# Altium PCB BuySellDisplay2.PcbDoc (part 1 of 2)
Units mil, origin at the board's own origin, x right, y up, seen from the top; angles counter-clockwise.
Board outline 6000 x 4000 mil, 2 copper layers (Top Layer, Bottom Layer); 218 components, 207 nets, 568 pads, 108 vias.
Unrouted connection lines stored in the file: 273.
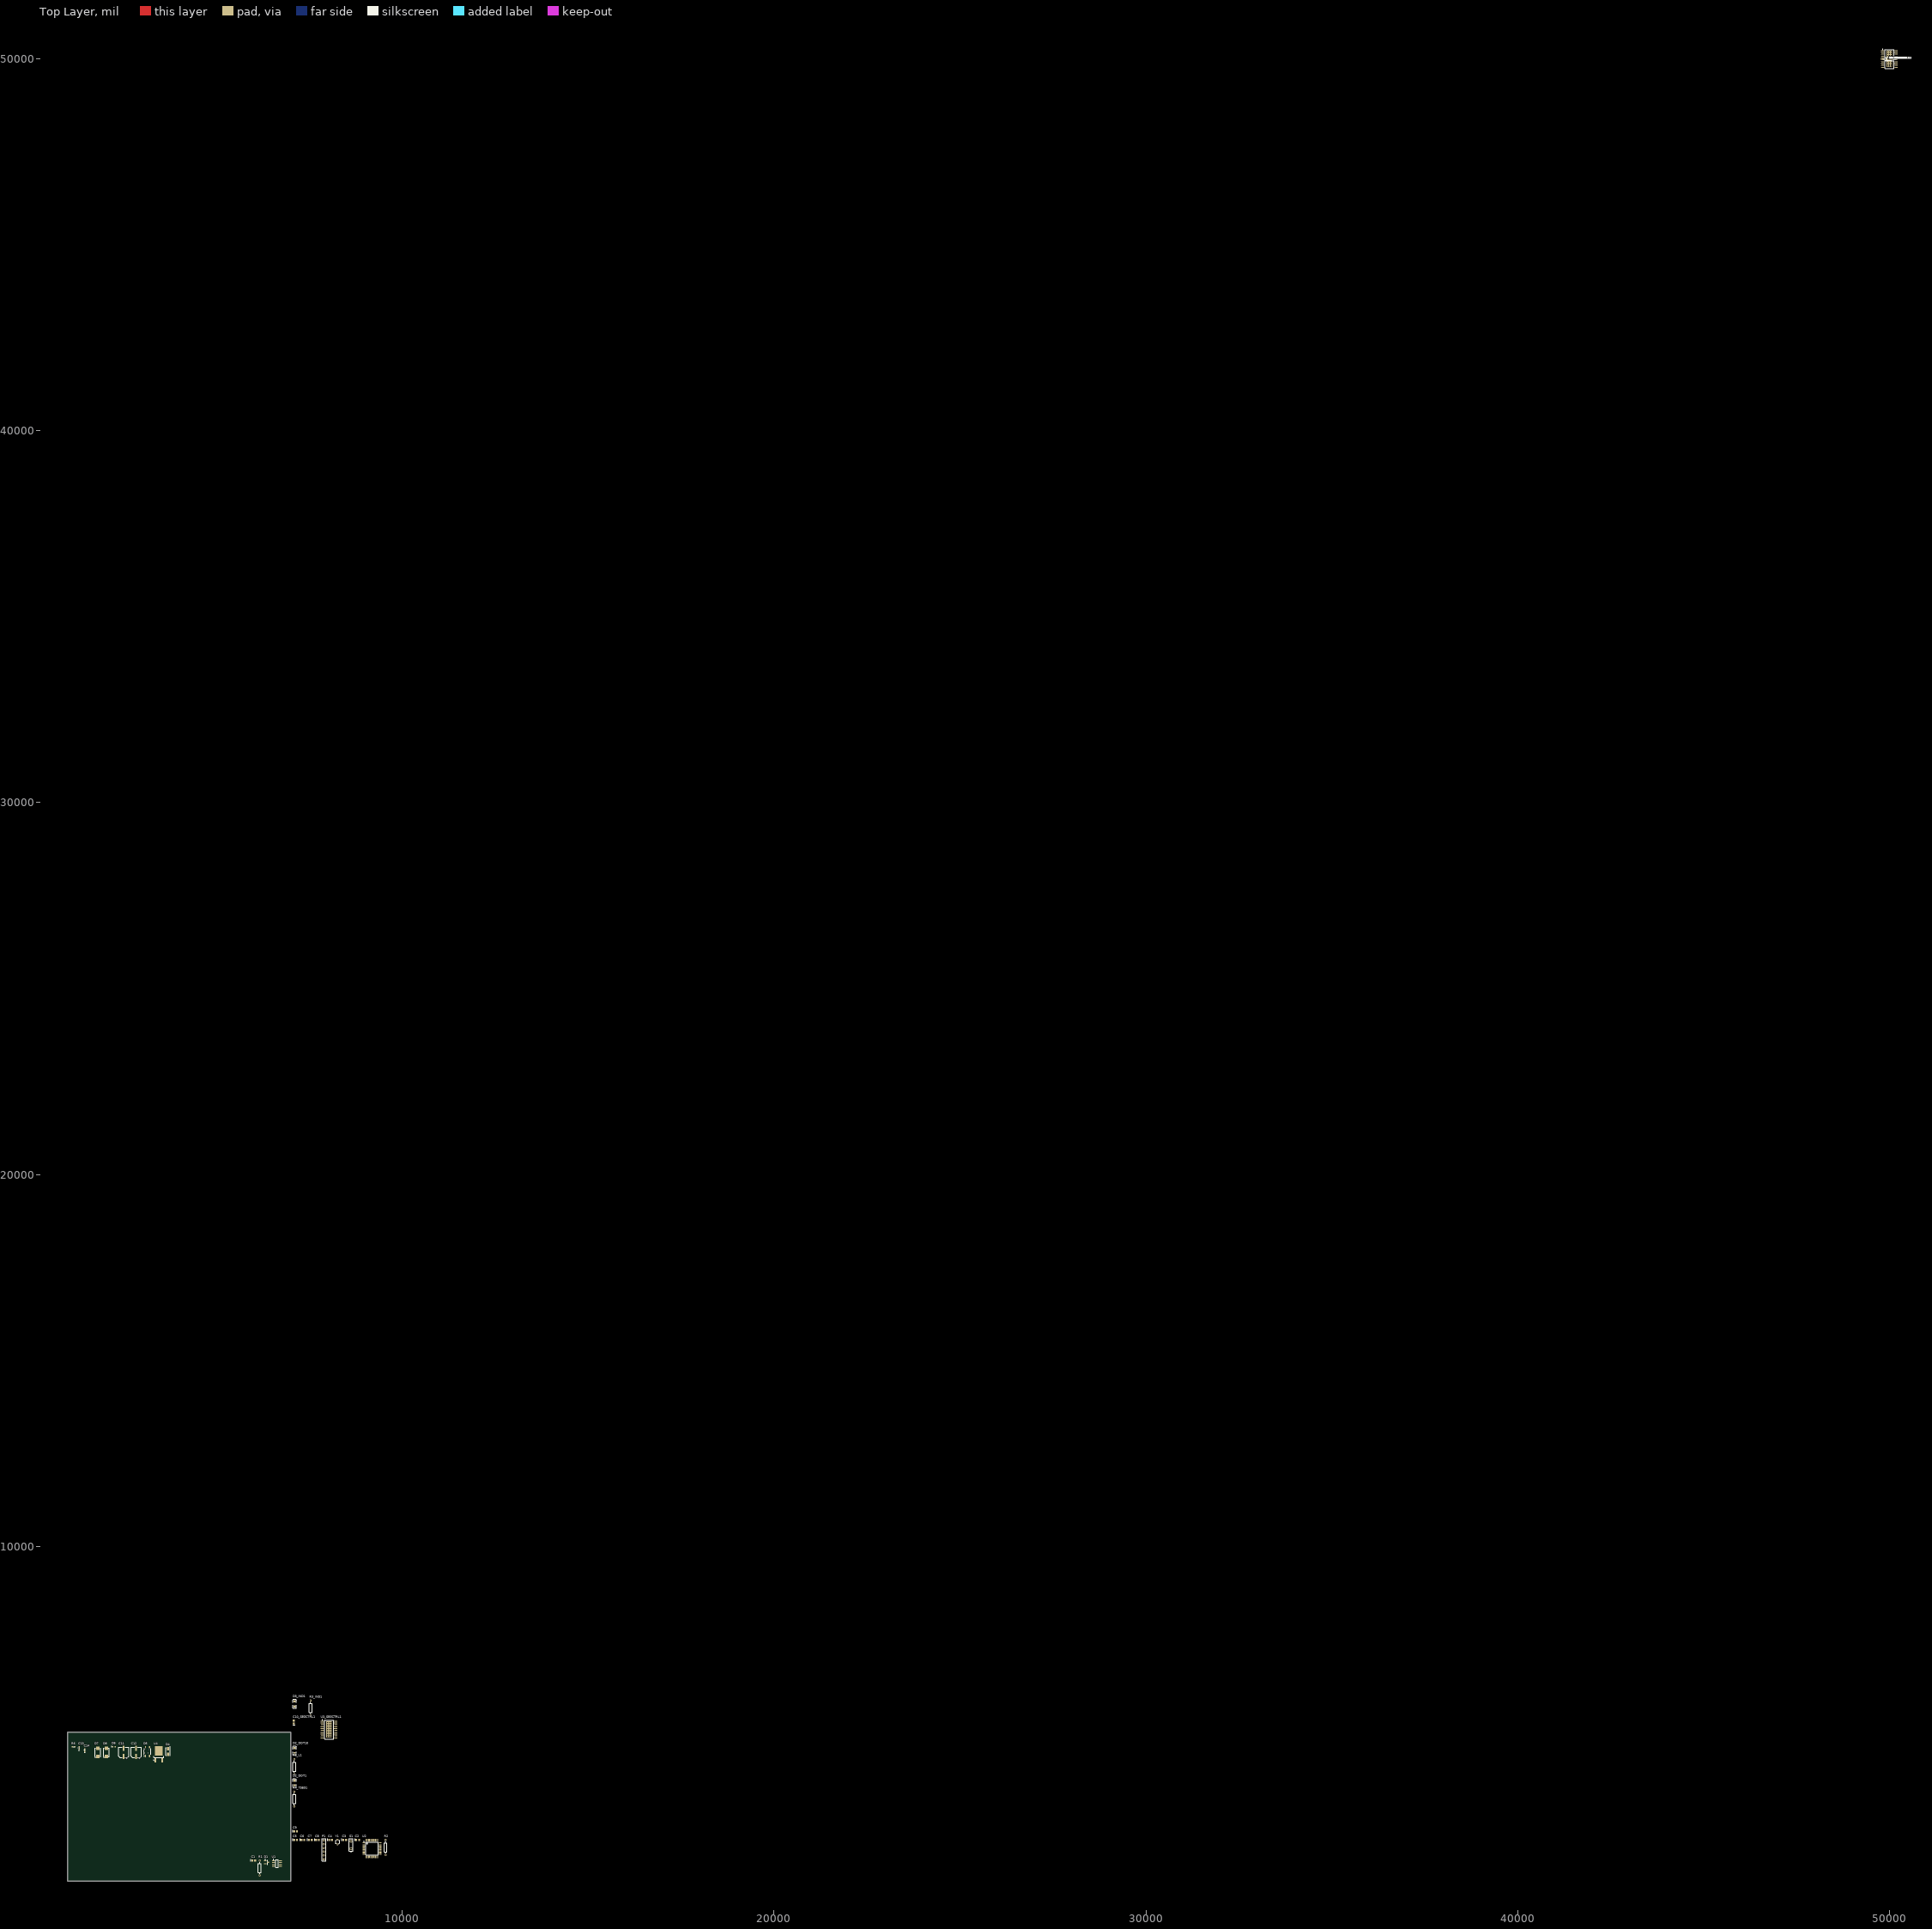
[diagram p0: Top Layer view]
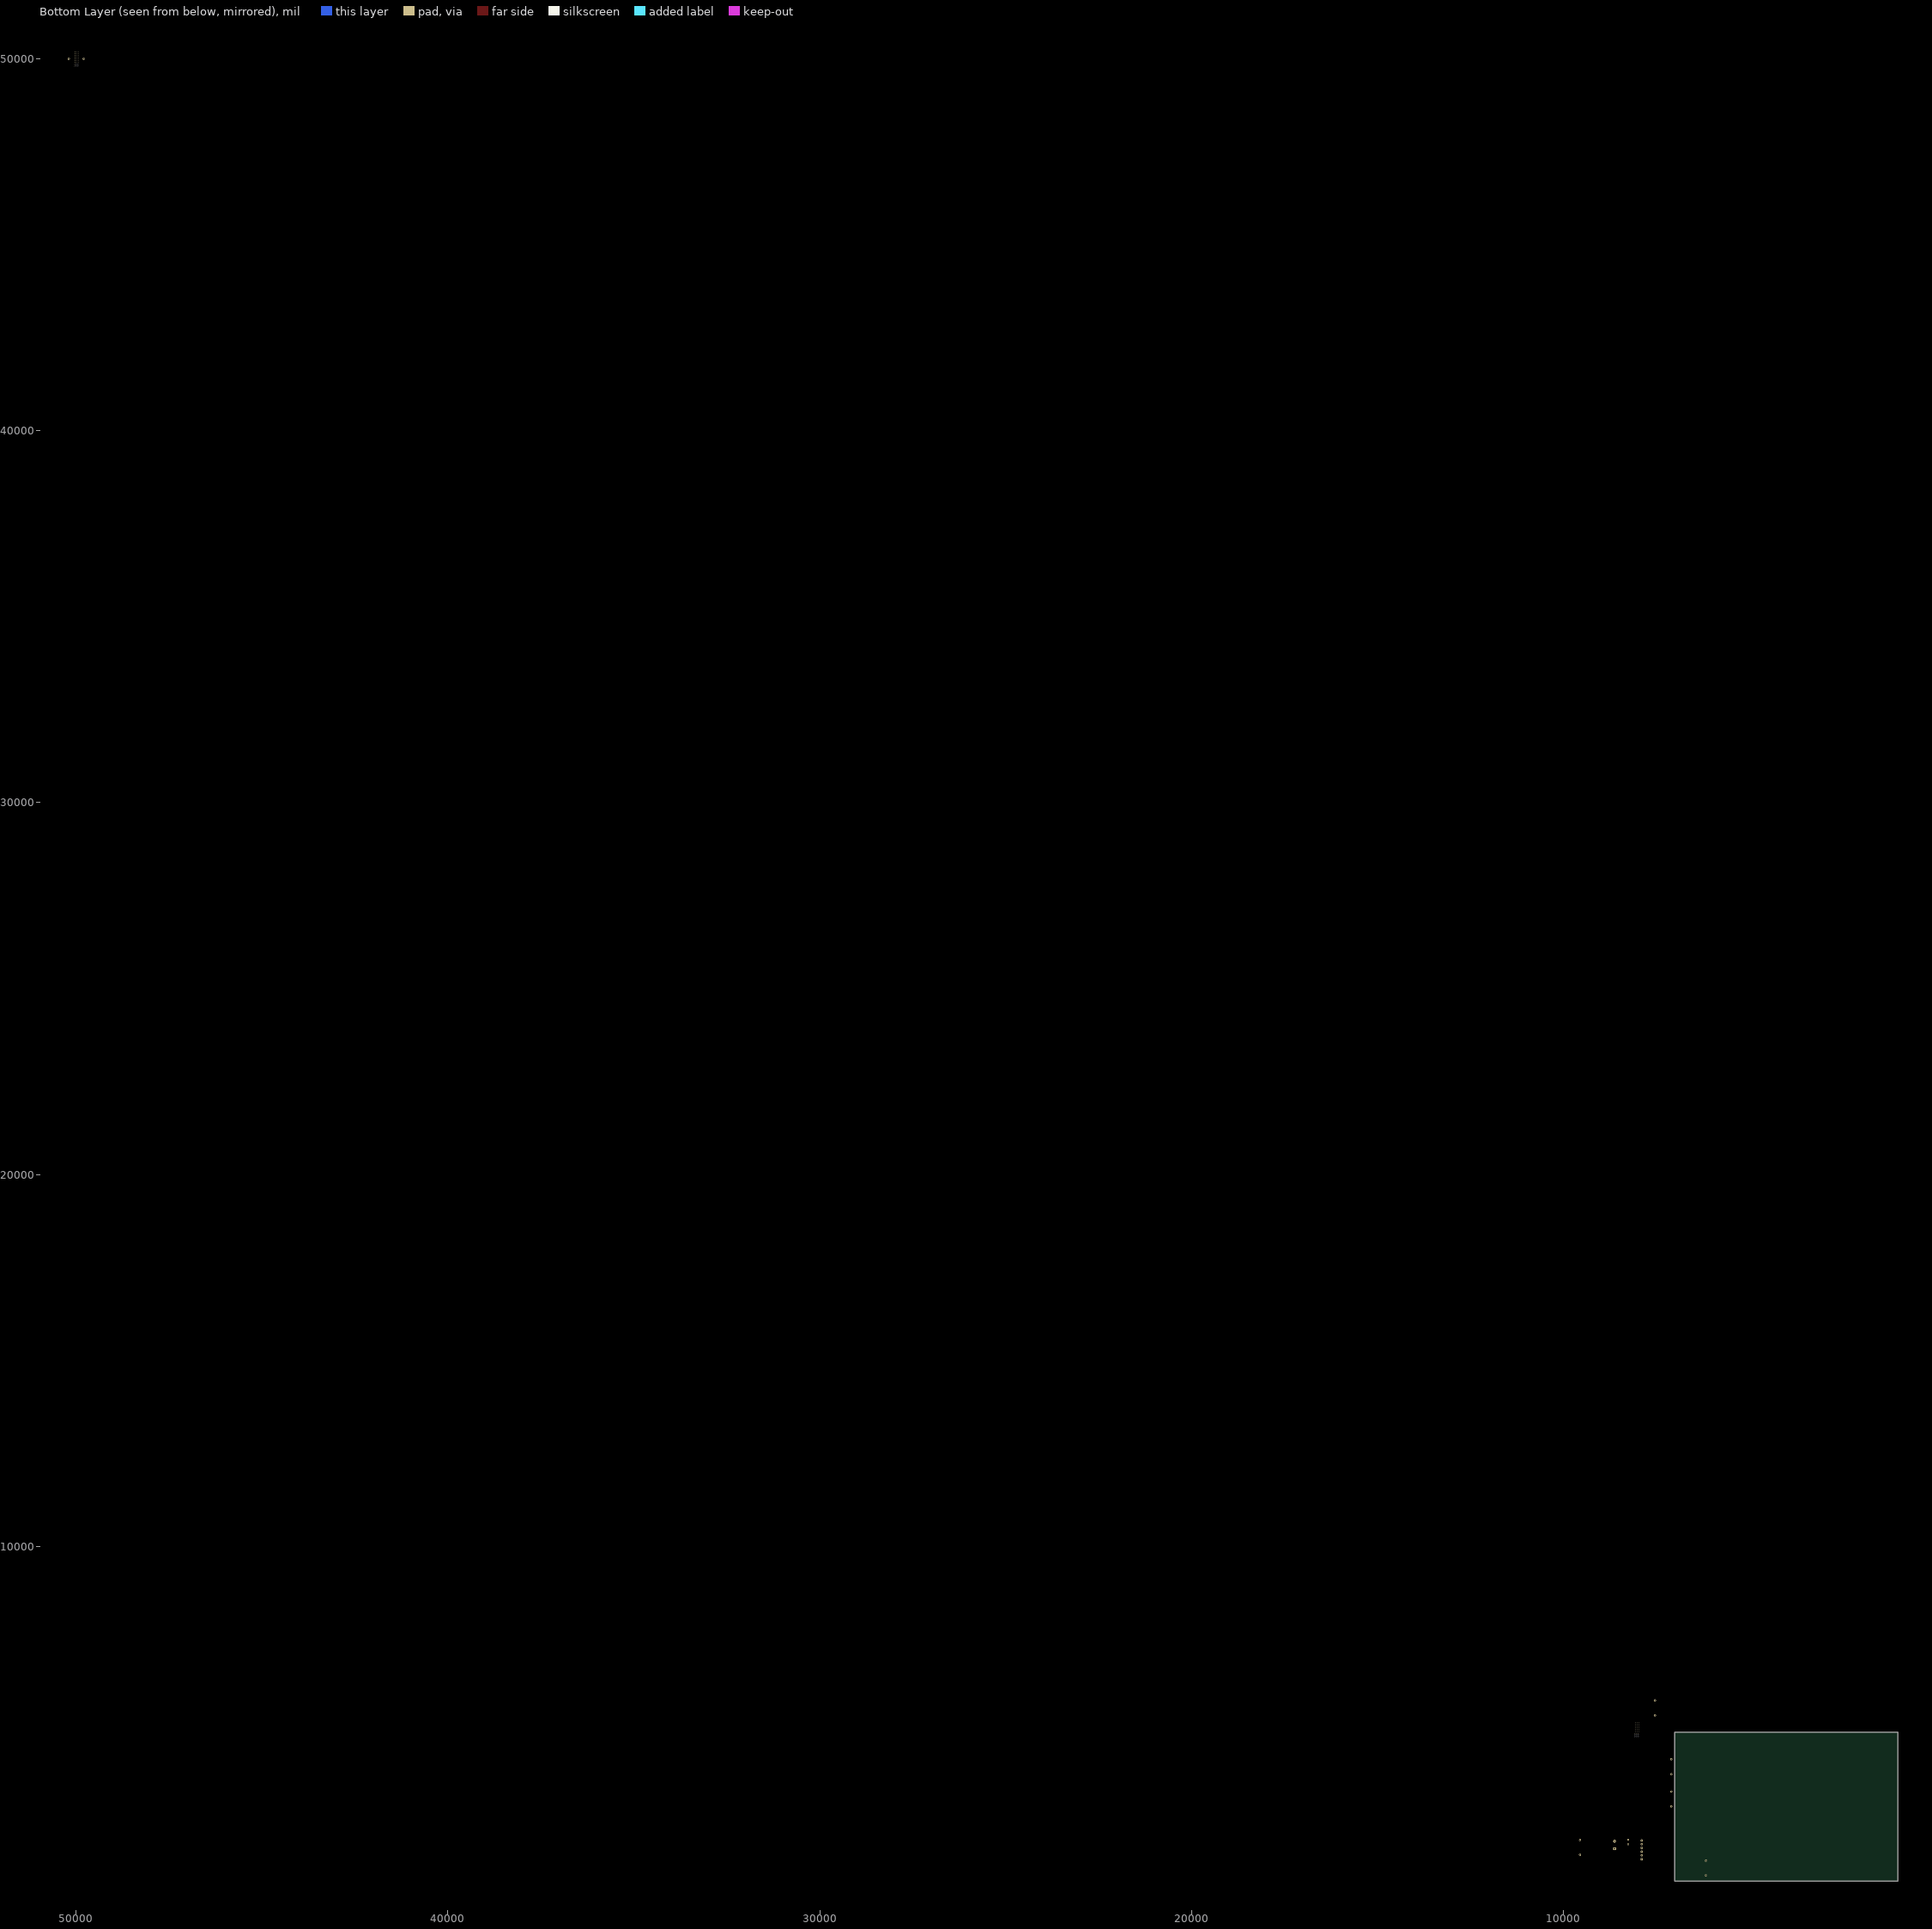
[diagram p1: Bottom Layer view, seen from below]

## Layer stack, top to bottom
Top Layer: signal copper 1.4
Dielectric: dielectric 12.6, FR-4, Dk 4.8
Bottom Layer: signal copper 1.4

## Board outline
1000,1000 7000,1000 7000,5000 1000,5000

## Design rules (kind name [scope] priority, off if disabled: settings)
Clearance [All] p1: gap=10
ComponentClearance [All] p1: gap=10 collisioncheckmode=3 verticalgap=10
PolygonConnect [All] p1: connectstyle=Relief reliefconductorwidth=10 reliefentries=4 polygonreliefangle="90 Angle"
RoomDefinition 7SEG1 [InComponentClass('7SEG1')] p1: confinementstyle=ConfineIn formatcopy=TRUE lockcomponents=FALSE outline 7045,2960 7520,2960 7520,3560 7045,3560
RoomDefinition 7SEG2 [InComponentClass('7SEG2')] p2: confinementstyle=ConfineIn formatcopy=TRUE lockcomponents=FALSE outline 49755,49950 50475,49950 50475,50075 49755,50075
RoomDefinition 7SEG3 [InComponentClass('7SEG3')] p3: confinementstyle=ConfineIn formatcopy=TRUE lockcomponents=FALSE outline 49755,49950 50475,49950 50475,50075 49755,50075
RoomDefinition 7SEG4 [InComponentClass('7SEG4')] p4: confinementstyle=ConfineIn formatcopy=TRUE lockcomponents=FALSE outline 49755,49950 50475,49950 50475,50075 49755,50075
RoomDefinition COM485 [InComponentClass('COM485')] p5: confinementstyle=ConfineIn formatcopy=TRUE lockcomponents=FALSE outline 5920,1105 6785,1105 6785,1695 5920,1695
RoomDefinition CPU [InComponentClass('CPU')] p6: confinementstyle=ConfineIn formatcopy=TRUE lockcomponents=FALSE outline 7045,1530 9635,1530 9635,2250 7045,2250
RoomDefinition DISPLAY [InComponentClass('DISPLAY')] p7: confinementstyle=ConfineIn formatcopy=TRUE lockcomponents=FALSE outline 7045,2300 7205,2300 7205,2480 7045,2480
RoomDefinition DOT1 [InComponentClass('DOT1')] p8: confinementstyle=ConfineIn formatcopy=TRUE lockcomponents=FALSE outline 7045,3510 7460,3510 7460,3880 7045,3880
RoomDefinition DOT2 [InComponentClass('DOT2')] p9: confinementstyle=ConfineIn formatcopy=TRUE lockcomponents=FALSE outline 49875,49945 50415,49945 50415,50075 49875,50075
RoomDefinition DOT3 [InComponentClass('DOT3')] p10: confinementstyle=ConfineIn formatcopy=TRUE lockcomponents=FALSE outline 49875,49945 50415,49945 50415,50075 49875,50075
RoomDefinition DOT4 [InComponentClass('DOT4')] p11: confinementstyle=ConfineIn formatcopy=TRUE lockcomponents=FALSE outline 49875,49945 50415,49945 50415,50075 49875,50075
RoomDefinition DOT5 [InComponentClass('DOT5')] p12: confinementstyle=ConfineIn formatcopy=TRUE lockcomponents=FALSE outline 49875,49945 50415,49945 50415,50075 49875,50075
RoomDefinition DOT6 [InComponentClass('DOT6')] p13: confinementstyle=ConfineIn formatcopy=TRUE lockcomponents=FALSE outline 49875,49945 50415,49945 50415,50075 49875,50075
RoomDefinition DOT7 [InComponentClass('DOT7')] p14: confinementstyle=ConfineIn formatcopy=TRUE lockcomponents=FALSE outline 49875,49945 50415,49945 50415,50075 49875,50075
RoomDefinition DOT8 [InComponentClass('DOT8')] p15: confinementstyle=ConfineIn formatcopy=TRUE lockcomponents=FALSE outline 49875,49945 50415,49945 50415,50075 49875,50075
RoomDefinition DOT9 [InComponentClass('DOT9')] p16: confinementstyle=ConfineIn formatcopy=TRUE lockcomponents=FALSE outline 49875,49945 50415,49945 50415,50075 49875,50075
RoomDefinition DOT10 [InComponentClass('DOT10')] p17: confinementstyle=ConfineIn formatcopy=TRUE lockcomponents=FALSE outline 7045,4380 7530,4380 7530,4750 7045,4750
RoomDefinition DOT11 [InComponentClass('DOT11')] p18: confinementstyle=ConfineIn formatcopy=TRUE lockcomponents=FALSE outline 49875,49945 50445,49945 50445,50075 49875,50075
RoomDefinition DOT12 [InComponentClass('DOT12')] p19: confinementstyle=ConfineIn formatcopy=TRUE lockcomponents=FALSE outline 49875,49945 50465,49945 50465,50075 49875,50075
RoomDefinition DOT13 [InComponentClass('DOT13')] p20: confinementstyle=ConfineIn formatcopy=TRUE lockcomponents=FALSE outline 49875,49945 50465,49945 50465,50075 49875,50075
RoomDefinition DOT14 [InComponentClass('DOT14')] p21: confinementstyle=ConfineIn formatcopy=TRUE lockcomponents=FALSE outline 49875,49945 50465,49945 50465,50075 49875,50075
RoomDefinition DOT15 [InComponentClass('DOT15')] p22: confinementstyle=ConfineIn formatcopy=TRUE lockcomponents=FALSE outline 49875,49945 50465,49945 50465,50075 49875,50075
RoomDefinition DOT16 [InComponentClass('DOT16')] p23: confinementstyle=ConfineIn formatcopy=TRUE lockcomponents=FALSE outline 49875,49945 50465,49945 50465,50075 49875,50075
RoomDefinition DOT17 [InComponentClass('DOT17')] p24: confinementstyle=ConfineIn formatcopy=TRUE lockcomponents=FALSE outline 49875,49945 50465,49945 50465,50075 49875,50075
RoomDefinition DOT18 [InComponentClass('DOT18')] p25: confinementstyle=ConfineIn formatcopy=TRUE lockcomponents=FALSE outline 49875,49945 50465,49945 50465,50075 49875,50075
RoomDefinition DOT19 [InComponentClass('DOT19')] p26: confinementstyle=ConfineIn formatcopy=TRUE lockcomponents=FALSE outline 49875,49945 50465,49945 50465,50075 49875,50075
RoomDefinition DOT20 [InComponentClass('DOT20')] p27: confinementstyle=ConfineIn formatcopy=TRUE lockcomponents=FALSE outline 49875,49945 50475,49945 50475,50075 49875,50075
RoomDefinition DOT21 [InComponentClass('DOT21')] p28: confinementstyle=ConfineIn formatcopy=TRUE lockcomponents=FALSE outline 49875,49945 50455,49945 50455,50075 49875,50075
RoomDefinition DOT22 [InComponentClass('DOT22')] p29: confinementstyle=ConfineIn formatcopy=TRUE lockcomponents=FALSE outline 49875,49945 50475,49945 50475,50075 49875,50075
RoomDefinition DOT23 [InComponentClass('DOT23')] p30: confinementstyle=ConfineIn formatcopy=TRUE lockcomponents=FALSE outline 49875,49945 50475,49945 50475,50075 49875,50075
RoomDefinition DOT24 [InComponentClass('DOT24')] p31: confinementstyle=ConfineIn formatcopy=TRUE lockcomponents=FALSE outline 49875,49945 50475,49945 50475,50075 49875,50075
RoomDefinition DOT25 [InComponentClass('DOT25')] p32: confinementstyle=ConfineIn formatcopy=TRUE lockcomponents=FALSE outline 49875,49945 50475,49945 50475,50075 49875,50075
RoomDefinition DOT26 [InComponentClass('DOT26')] p33: confinementstyle=ConfineIn formatcopy=TRUE lockcomponents=FALSE outline 49875,49945 50475,49945 50475,50075 49875,50075
RoomDefinition DOT27 [InComponentClass('DOT27')] p34: confinementstyle=ConfineIn formatcopy=TRUE lockcomponents=FALSE outline 49875,49945 50475,49945 50475,50075 49875,50075
RoomDefinition DOT28 [InComponentClass('DOT28')] p35: confinementstyle=ConfineIn formatcopy=TRUE lockcomponents=FALSE outline 49875,49945 50475,49945 50475,50075 49875,50075
RoomDefinition DOT29 [InComponentClass('DOT29')] p36: confinementstyle=ConfineIn formatcopy=TRUE lockcomponents=FALSE outline 49875,49945 50475,49945 50475,50075 49875,50075
RoomDefinition DOT30 [InComponentClass('DOT30')] p37: confinementstyle=ConfineIn formatcopy=TRUE lockcomponents=FALSE outline 49875,49945 50475,49945 50475,50075 49875,50075
RoomDefinition DOT31 [InComponentClass('DOT31')] p38: confinementstyle=ConfineIn formatcopy=TRUE lockcomponents=FALSE outline 49875,49945 50455,49945 50455,50075 49875,50075
RoomDefinition DOT32 [InComponentClass('DOT32')] p39: confinementstyle=ConfineIn formatcopy=TRUE lockcomponents=FALSE outline 49875,49945 50475,49945 50475,50075 49875,50075
RoomDefinition DOT33 [InComponentClass('DOT33')] p40: confinementstyle=ConfineIn formatcopy=TRUE lockcomponents=FALSE outline 49875,49945 50475,49945 50475,50075 49875,50075
RoomDefinition DOT34 [InComponentClass('DOT34')] p41: confinementstyle=ConfineIn formatcopy=TRUE lockcomponents=FALSE outline 49875,49945 50475,49945 50475,50075 49875,50075
RoomDefinition DOT35 [InComponentClass('DOT35')] p42: confinementstyle=ConfineIn formatcopy=TRUE lockcomponents=FALSE outline 49875,49945 50475,49945 50475,50075 49875,50075
RoomDefinition DOT36 [InComponentClass('DOT36')] p43: confinementstyle=ConfineIn formatcopy=TRUE lockcomponents=FALSE outline 49875,49945 50475,49945 50475,50075 49875,50075
RoomDefinition DOT37 [InComponentClass('DOT37')] p44: confinementstyle=ConfineIn formatcopy=TRUE lockcomponents=FALSE outline 49875,49945 50475,49945 50475,50075 49875,50075
RoomDefinition DOT38 [InComponentClass('DOT38')] p45: confinementstyle=ConfineIn formatcopy=TRUE lockcomponents=FALSE outline 49875,49945 50475,49945 50475,50075 49875,50075
RoomDefinition DOT39 [InComponentClass('DOT39')] p46: confinementstyle=ConfineIn formatcopy=TRUE lockcomponents=FALSE outline 49875,49945 50475,49945 50475,50075 49875,50075
RoomDefinition DOT40 [InComponentClass('DOT40')] p47: confinementstyle=ConfineIn formatcopy=TRUE lockcomponents=FALSE outline 49875,49945 50475,49945 50475,50075 49875,50075
RoomDefinition DOT41 [InComponentClass('DOT41')] p48: confinementstyle=ConfineIn formatcopy=TRUE lockcomponents=FALSE outline 49875,49945 50455,49945 50455,50075 49875,50075
RoomDefinition DOT42 [InComponentClass('DOT42')] p49: confinementstyle=ConfineIn formatcopy=TRUE lockcomponents=FALSE outline 49875,49945 50475,49945 50475,50075 49875,50075
RoomDefinition DOT43 [InComponentClass('DOT43')] p50: confinementstyle=ConfineIn formatcopy=TRUE lockcomponents=FALSE outline 49875,49945 50475,49945 50475,50075 49875,50075
RoomDefinition DOT44 [InComponentClass('DOT44')] p51: confinementstyle=ConfineIn formatcopy=TRUE lockcomponents=FALSE outline 49875,49945 50475,49945 50475,50075 49875,50075
RoomDefinition DOT45 [InComponentClass('DOT45')] p52: confinementstyle=ConfineIn formatcopy=TRUE lockcomponents=FALSE outline 49875,49945 50475,49945 50475,50075 49875,50075
RoomDefinition DOT46 [InComponentClass('DOT46')] p53: confinementstyle=ConfineIn formatcopy=TRUE lockcomponents=FALSE outline 49875,49945 50475,49945 50475,50075 49875,50075
RoomDefinition DOT47 [InComponentClass('DOT47')] p54: confinementstyle=ConfineIn formatcopy=TRUE lockcomponents=FALSE outline 49875,49945 50475,49945 50475,50075 49875,50075
RoomDefinition DOT48 [InComponentClass('DOT48')] p55: confinementstyle=ConfineIn formatcopy=TRUE lockcomponents=FALSE outline 49875,49945 50475,49945 50475,50075 49875,50075
RoomDefinition DOT49 [InComponentClass('DOT49')] p56: confinementstyle=ConfineIn formatcopy=TRUE lockcomponents=FALSE outline 49875,49945 50475,49945 50475,50075 49875,50075
RoomDefinition DOT50 [InComponentClass('DOT50')] p57: confinementstyle=ConfineIn formatcopy=TRUE lockcomponents=FALSE outline 49875,49945 50475,49945 50475,50075 49875,50075
RoomDefinition DOT51 [InComponentClass('DOT51')] p58: confinementstyle=ConfineIn formatcopy=TRUE lockcomponents=FALSE outline 49875,49945 50455,49945 50455,50075 49875,50075
RoomDefinition DOT52 [InComponentClass('DOT52')] p59: confinementstyle=ConfineIn formatcopy=TRUE lockcomponents=FALSE outline 49875,49945 50475,49945 50475,50075 49875,50075
RoomDefinition DOT53 [InComponentClass('DOT53')] p60: confinementstyle=ConfineIn formatcopy=TRUE lockcomponents=FALSE outline 49875,49945 50475,49945 50475,50075 49875,50075
RoomDefinition DOT54 [InComponentClass('DOT54')] p61: confinementstyle=ConfineIn formatcopy=TRUE lockcomponents=FALSE outline 49875,49945 50475,49945 50475,50075 49875,50075
RoomDefinition DOT55 [InComponentClass('DOT55')] p62: confinementstyle=ConfineIn formatcopy=TRUE lockcomponents=FALSE outline 49875,49945 50475,49945 50475,50075 49875,50075
RoomDefinition DOT56 [InComponentClass('DOT56')] p63: confinementstyle=ConfineIn formatcopy=TRUE lockcomponents=FALSE outline 49875,49945 50475,49945 50475,50075 49875,50075
RoomDefinition DOT57 [InComponentClass('DOT57')] p64: confinementstyle=ConfineIn formatcopy=TRUE lockcomponents=FALSE outline 49875,49945 50475,49945 50475,50075 49875,50075
RoomDefinition DOT58 [InComponentClass('DOT58')] p65: confinementstyle=ConfineIn formatcopy=TRUE lockcomponents=FALSE outline 49875,49945 50475,49945 50475,50075 49875,50075
RoomDefinition DOT59 [InComponentClass('DOT59')] p66: confinementstyle=ConfineIn formatcopy=TRUE lockcomponents=FALSE outline 49875,49945 50475,49945 50475,50075 49875,50075
RoomDefinition DOT60 [InComponentClass('DOT60')] p67: confinementstyle=ConfineIn formatcopy=TRUE lockcomponents=FALSE outline 49875,49945 50475,49945 50475,50075 49875,50075
RoomDefinition DOT61 [InComponentClass('DOT61')] p68: confinementstyle=ConfineIn formatcopy=TRUE lockcomponents=FALSE outline 49875,49945 50455,49945 50455,50075 49875,50075
RoomDefinition DOT62 [InComponentClass('DOT62')] p69: confinementstyle=ConfineIn formatcopy=TRUE lockcomponents=FALSE outline 49875,49945 50475,49945 50475,50075 49875,50075
RoomDefinition DOT63 [InComponentClass('DOT63')] p70: confinementstyle=ConfineIn formatcopy=TRUE lockcomponents=FALSE outline 49875,49945 50475,49945 50475,50075 49875,50075
RoomDefinition DOT64 [InComponentClass('DOT64')] p71: confinementstyle=ConfineIn formatcopy=TRUE lockcomponents=FALSE outline 49875,49945 50475,49945 50475,50075 49875,50075
RoomDefinition DOT65 [InComponentClass('DOT65')] p72: confinementstyle=ConfineIn formatcopy=TRUE lockcomponents=FALSE outline 49875,49945 50475,49945 50475,50075 49875,50075
RoomDefinition DOT66 [InComponentClass('DOT66')] p73: confinementstyle=ConfineIn formatcopy=TRUE lockcomponents=FALSE outline 49875,49945 50475,49945 50475,50075 49875,50075
RoomDefinition DOT67 [InComponentClass('DOT67')] p74: confinementstyle=ConfineIn formatcopy=TRUE lockcomponents=FALSE outline 49875,49945 50475,49945 50475,50075 49875,50075
RoomDefinition DOT68 [InComponentClass('DOT68')] p75: confinementstyle=ConfineIn formatcopy=TRUE lockcomponents=FALSE outline 49875,49945 50475,49945 50475,50075 49875,50075
RoomDefinition DOT69 [InComponentClass('DOT69')] p76: confinementstyle=ConfineIn formatcopy=TRUE lockcomponents=FALSE outline 49875,49945 50475,49945 50475,50075 49875,50075
RoomDefinition DOT70 [InComponentClass('DOT70')] p77: confinementstyle=ConfineIn formatcopy=TRUE lockcomponents=FALSE outline 49875,49945 50475,49945 50475,50075 49875,50075
RoomDefinition DOT71 [InComponentClass('DOT71')] p78: confinementstyle=ConfineIn formatcopy=TRUE lockcomponents=FALSE outline 49875,49945 50455,49945 50455,50075 49875,50075
RoomDefinition DOT72 [InComponentClass('DOT72')] p79: confinementstyle=ConfineIn formatcopy=TRUE lockcomponents=FALSE outline 49875,49945 50475,49945 50475,50075 49875,50075
RoomDefinition DOT73 [InComponentClass('DOT73')] p80: confinementstyle=ConfineIn formatcopy=TRUE lockcomponents=FALSE outline 49875,49945 50475,49945 50475,50075 49875,50075
RoomDefinition DOT74 [InComponentClass('DOT74')] p81: confinementstyle=ConfineIn formatcopy=TRUE lockcomponents=FALSE outline 49875,49945 50475,49945 50475,50075 49875,50075
RoomDefinition DOT75 [InComponentClass('DOT75')] p82: confinementstyle=ConfineIn formatcopy=TRUE lockcomponents=FALSE outline 49875,49945 50475,49945 50475,50075 49875,50075
RoomDefinition DOT76 [InComponentClass('DOT76')] p83: confinementstyle=ConfineIn formatcopy=TRUE lockcomponents=FALSE outline 49875,49945 50475,49945 50475,50075 49875,50075
RoomDefinition DOT77 [InComponentClass('DOT77')] p84: confinementstyle=ConfineIn formatcopy=TRUE lockcomponents=FALSE outline 49875,49945 50475,49945 50475,50075 49875,50075
RoomDefinition DOT78 [InComponentClass('DOT78')] p85: confinementstyle=ConfineIn formatcopy=TRUE lockcomponents=FALSE outline 49875,49945 50475,49945 50475,50075 49875,50075
RoomDefinition DOT79 [InComponentClass('DOT79')] p86: confinementstyle=ConfineIn formatcopy=TRUE lockcomponents=FALSE outline 49875,49945 50475,49945 50475,50075 49875,50075
RoomDefinition DOT80 [InComponentClass('DOT80')] p87: confinementstyle=ConfineIn formatcopy=TRUE lockcomponents=FALSE outline 49875,49945 50475,49945 50475,50075 49875,50075
RoomDefinition DOT81 [InComponentClass('DOT81')] p88: confinementstyle=ConfineIn formatcopy=TRUE lockcomponents=FALSE outline 49875,49945 50455,49945 50455,50075 49875,50075
RoomDefinition DOT82 [InComponentClass('DOT82')] p89: confinementstyle=ConfineIn formatcopy=TRUE lockcomponents=FALSE outline 49875,49945 50475,49945 50475,50075 49875,50075
RoomDefinition DOT83 [InComponentClass('DOT83')] p90: confinementstyle=ConfineIn formatcopy=TRUE lockcomponents=FALSE outline 49875,49945 50475,49945 50475,50075 49875,50075
RoomDefinition DOT84 [InComponentClass('DOT84')] p91: confinementstyle=ConfineIn formatcopy=TRUE lockcomponents=FALSE outline 49875,49945 50475,49945 50475,50075 49875,50075
RoomDefinition DOT85 [InComponentClass('DOT85')] p92: confinementstyle=ConfineIn formatcopy=TRUE lockcomponents=FALSE outline 49875,49945 50475,49945 50475,50075 49875,50075
RoomDefinition DOT86 [InComponentClass('DOT86')] p93: confinementstyle=ConfineIn formatcopy=TRUE lockcomponents=FALSE outline 49875,49945 50475,49945 50475,50075 49875,50075
RoomDefinition DOT87 [InComponentClass('DOT87')] p94: confinementstyle=ConfineIn formatcopy=TRUE lockcomponents=FALSE outline 49875,49945 50475,49945 50475,50075 49875,50075
RoomDefinition DOT88 [InComponentClass('DOT88')] p95: confinementstyle=ConfineIn formatcopy=TRUE lockcomponents=FALSE outline 49875,49945 50475,49945 50475,50075 49875,50075
RoomDefinition DOT89 [InComponentClass('DOT89')] p96: confinementstyle=ConfineIn formatcopy=TRUE lockcomponents=FALSE outline 49875,49945 50475,49945 50475,50075 49875,50075
RoomDefinition DOT90 [InComponentClass('DOT90')] p97: confinementstyle=ConfineIn formatcopy=TRUE lockcomponents=FALSE outline 49875,49945 50475,49945 50475,50075 49875,50075
RoomDefinition DOT91 [InComponentClass('DOT91')] p98: confinementstyle=ConfineIn formatcopy=TRUE lockcomponents=FALSE outline 49875,49945 50455,49945 50455,50075 49875,50075
RoomDefinition DOT92 [InComponentClass('DOT92')] p99: confinementstyle=ConfineIn formatcopy=TRUE lockcomponents=FALSE outline 49875,49945 50475,49945 50475,50075 49875,50075
RoomDefinition DOT93 [InComponentClass('DOT93')] p100: confinementstyle=ConfineIn formatcopy=TRUE lockcomponents=FALSE outline 49875,49945 50475,49945 50475,50075 49875,50075
RoomDefinition DOT94 [InComponentClass('DOT94')] p101: confinementstyle=ConfineIn formatcopy=TRUE lockcomponents=FALSE outline 49875,49945 50475,49945 50475,50075 49875,50075
RoomDefinition DOT95 [InComponentClass('DOT95')] p102: confinementstyle=ConfineIn formatcopy=TRUE lockcomponents=FALSE outline 49875,49945 50475,49945 50475,50075 49875,50075
RoomDefinition DOT96 [InComponentClass('DOT96')] p103: confinementstyle=ConfineIn formatcopy=TRUE lockcomponents=FALSE outline 49875,49945 50475,49945 50475,50075 49875,50075
RoomDefinition DOT97 [InComponentClass('DOT97')] p104: confinementstyle=ConfineIn formatcopy=TRUE lockcomponents=FALSE outline 49875,49945 50475,49945 50475,50075 49875,50075
RoomDefinition DOT98 [InComponentClass('DOT98')] p105: confinementstyle=ConfineIn formatcopy=TRUE lockcomponents=FALSE outline 49875,49945 50475,49945 50475,50075 49875,50075
RoomDefinition DOT99 [InComponentClass('DOT99')] p106: confinementstyle=ConfineIn formatcopy=TRUE lockcomponents=FALSE outline 49875,49945 50475,49945 50475,50075 49875,50075
RoomDefinition DOT100 [InComponentClass('DOT100')] p107: confinementstyle=ConfineIn formatcopy=TRUE lockcomponents=FALSE outline 49875,49945 50525,49945 50525,50075 49875,50075
RoomDefinition DOT101 [InComponentClass('DOT101')] p108: confinementstyle=ConfineIn formatcopy=TRUE lockcomponents=FALSE outline 49875,49945 50505,49945 50505,50075 49875,50075
RoomDefinition DOT102 [InComponentClass('DOT102')] p109: confinementstyle=ConfineIn formatcopy=TRUE lockcomponents=FALSE outline 49875,49945 50525,49945 50525,50075 49875,50075
RoomDefinition DOT103 [InComponentClass('DOT103')] p110: confinementstyle=ConfineIn formatcopy=TRUE lockcomponents=FALSE outline 49875,49945 50525,49945 50525,50075 49875,50075
RoomDefinition DOT104 [InComponentClass('DOT104')] p111: confinementstyle=ConfineIn formatcopy=TRUE lockcomponents=FALSE outline 49875,49945 50525,49945 50525,50075 49875,50075
RoomDefinition DOT105 [InComponentClass('DOT105')] p112: confinementstyle=ConfineIn formatcopy=TRUE lockcomponents=FALSE outline 49875,49945 50525,49945 50525,50075 49875,50075
RoomDefinition DOT106 [InComponentClass('DOT106')] p113: confinementstyle=ConfineIn formatcopy=TRUE lockcomponents=FALSE outline 49875,49945 50525,49945 50525,50075 49875,50075
RoomDefinition DOT107 [InComponentClass('DOT107')] p114: confinementstyle=ConfineIn formatcopy=TRUE lockcomponents=FALSE outline 49875,49945 50525,49945 50525,50075 49875,50075
RoomDefinition DOT108 [InComponentClass('DOT108')] p115: confinementstyle=ConfineIn formatcopy=TRUE lockcomponents=FALSE outline 49875,49945 50525,49945 50525,50075 49875,50075
RoomDefinition DOT109 [InComponentClass('DOT109')] p116: confinementstyle=ConfineIn formatcopy=TRUE lockcomponents=FALSE outline 49875,49945 50525,49945 50525,50075 49875,50075
RoomDefinition DOT110 [InComponentClass('DOT110')] p117: confinementstyle=ConfineIn formatcopy=TRUE lockcomponents=FALSE outline 49875,49945 50515,49945 50515,50075 49875,50075
RoomDefinition DOT111 [InComponentClass('DOT111')] p118: confinementstyle=ConfineIn formatcopy=TRUE lockcomponents=FALSE outline 49875,49945 50495,49945 50495,50075 49875,50075
RoomDefinition DOT112 [InComponentClass('DOT112')] p119: confinementstyle=ConfineIn formatcopy=TRUE lockcomponents=FALSE outline 49875,49945 50515,49945 50515,50075 49875,50075
RoomDefinition DOT113 [InComponentClass('DOT113')] p120: confinementstyle=ConfineIn formatcopy=TRUE lockcomponents=FALSE outline 49875,49945 50515,49945 50515,50075 49875,50075
RoomDefinition DOT114 [InComponentClass('DOT114')] p121: confinementstyle=ConfineIn formatcopy=TRUE lockcomponents=FALSE outline 49875,49945 50515,49945 50515,50075 49875,50075
RoomDefinition DOT115 [InComponentClass('DOT115')] p122: confinementstyle=ConfineIn formatcopy=TRUE lockcomponents=FALSE outline 49875,49945 50515,49945 50515,50075 49875,50075
RoomDefinition DOT116 [InComponentClass('DOT116')] p123: confinementstyle=ConfineIn formatcopy=TRUE lockcomponents=FALSE outline 49875,49945 50515,49945 50515,50075 49875,50075
RoomDefinition DOT117 [InComponentClass('DOT117')] p124: confinementstyle=ConfineIn formatcopy=TRUE lockcomponents=FALSE outline 49875,49945 50515,49945 50515,50075 49875,50075
RoomDefinition DOT118 [InComponentClass('DOT118')] p125: confinementstyle=ConfineIn formatcopy=TRUE lockcomponents=FALSE outline 49875,49945 50515,49945 50515,50075 49875,50075
RoomDefinition DOT119 [InComponentClass('DOT119')] p126: confinementstyle=ConfineIn formatcopy=TRUE lockcomponents=FALSE outline 49875,49945 50515,49945 50515,50075 49875,50075
RoomDefinition DOT120 [InComponentClass('DOT120')] p127: confinementstyle=ConfineIn formatcopy=TRUE lockcomponents=FALSE outline 49875,49945 50525,49945 50525,50075 49875,50075
RoomDefinition DOT121 [InComponentClass('DOT121')] p128: confinementstyle=ConfineIn formatcopy=TRUE lockcomponents=FALSE outline 49875,49945 50505,49945 50505,50075 49875,50075
RoomDefinition DOT122 [InComponentClass('DOT122')] p129: confinementstyle=ConfineIn formatcopy=TRUE lockcomponents=FALSE outline 49875,49945 50525,49945 50525,50075 49875,50075
RoomDefinition DOT123 [InComponentClass('DOT123')] p130: confinementstyle=ConfineIn formatcopy=TRUE lockcomponents=FALSE outline 49875,49945 50525,49945 50525,50075 49875,50075
RoomDefinition DOT124 [InComponentClass('DOT124')] p131: confinementstyle=ConfineIn formatcopy=TRUE lockcomponents=FALSE outline 49875,49945 50525,49945 50525,50075 49875,50075
RoomDefinition DOT125 [InComponentClass('DOT125')] p132: confinementstyle=ConfineIn formatcopy=TRUE lockcomponents=FALSE outline 49875,49945 50525,49945 50525,50075 49875,50075
RoomDefinition DOT126 [InComponentClass('DOT126')] p133: confinementstyle=ConfineIn formatcopy=TRUE lockcomponents=FALSE outline 49875,49945 50525,49945 50525,50075 49875,50075
RoomDefinition DOT127 [InComponentClass('DOT127')] p134: confinementstyle=ConfineIn formatcopy=TRUE lockcomponents=FALSE outline 49875,49945 50525,49945 50525,50075 49875,50075
RoomDefinition DOT128 [InComponentClass('DOT128')] p135: confinementstyle=ConfineIn formatcopy=TRUE lockcomponents=FALSE outline 49875,49945 50525,49945 50525,50075 49875,50075
RoomDefinition DOT129 [InComponentClass('DOT129')] p136: confinementstyle=ConfineIn formatcopy=TRUE lockcomponents=FALSE outline 49875,49945 50525,49945 50525,50075 49875,50075
RoomDefinition DOT130 [InComponentClass('DOT130')] p137: confinementstyle=ConfineIn formatcopy=TRUE lockcomponents=FALSE outline 49875,49945 50525,49945 50525,50075 49875,50075
RoomDefinition DOT131 [InComponentClass('DOT131')] p138: confinementstyle=ConfineIn formatcopy=TRUE lockcomponents=FALSE outline 49875,49945 50505,49945 50505,50075 49875,50075
RoomDefinition DOT132 [InComponentClass('DOT132')] p139: confinementstyle=ConfineIn formatcopy=TRUE lockcomponents=FALSE outline 49875,49945 50525,49945 50525,50075 49875,50075
RoomDefinition DOT133 [InComponentClass('DOT133')] p140: confinementstyle=ConfineIn formatcopy=TRUE lockcomponents=FALSE outline 49875,49945 50525,49945 50525,50075 49875,50075
RoomDefinition DOT134 [InComponentClass('DOT134')] p141: confinementstyle=ConfineIn formatcopy=TRUE lockcomponents=FALSE outline 49875,49945 50525,49945 50525,50075 49875,50075
RoomDefinition DOT135 [InComponentClass('DOT135')] p142: confinementstyle=ConfineIn formatcopy=TRUE lockcomponents=FALSE outline 49875,49945 50525,49945 50525,50075 49875,50075
RoomDefinition DOT136 [InComponentClass('DOT136')] p143: confinementstyle=ConfineIn formatcopy=TRUE lockcomponents=FALSE outline 49875,49945 50525,49945 50525,50075 49875,50075
RoomDefinition DOT137 [InComponentClass('DOT137')] p144: confinementstyle=ConfineIn formatcopy=TRUE lockcomponents=FALSE outline 49875,49945 50525,49945 50525,50075 49875,50075
RoomDefinition DOT138 [InComponentClass('DOT138')] p145: confinementstyle=ConfineIn formatcopy=TRUE lockcomponents=FALSE outline 49875,49945 50525,49945 50525,50075 49875,50075
RoomDefinition DOT139 [InComponentClass('DOT139')] p146: confinementstyle=ConfineIn formatcopy=TRUE lockcomponents=FALSE outline 49875,49945 50525,49945 50525,50075 49875,50075
RoomDefinition DOT140 [InComponentClass('DOT140')] p147: confinementstyle=ConfineIn formatcopy=TRUE lockcomponents=FALSE outline 49875,49945 50525,49945 50525,50075 49875,50075
RoomDefinition DOT141 [InComponentClass('DOT141')] p148: confinementstyle=ConfineIn formatcopy=TRUE lockcomponents=FALSE outline 49875,49945 50505,49945 50505,50075 49875,50075
RoomDefinition DOT142 [InComponentClass('DOT142')] p149: confinementstyle=ConfineIn formatcopy=TRUE lockcomponents=FALSE outline 49875,49945 50525,49945 50525,50075 49875,50075
RoomDefinition DOT143 [InComponentClass('DOT143')] p150: confinementstyle=ConfineIn formatcopy=TRUE lockcomponents=FALSE outline 49875,49945 50525,49945 50525,50075 49875,50075
RoomDefinition DOT144 [InComponentClass('DOT144')] p151: confinementstyle=ConfineIn formatcopy=TRUE lockcomponents=FALSE outline 49875,49945 50525,49945 50525,50075 49875,50075
RoomDefinition IND1 [InComponentClass('IND1')] p152: confinementstyle=ConfineIn formatcopy=TRUE lockcomponents=FALSE outline 7045,5410 7890,5410 7890,6010 7045,6010
RoomDefinition IND2 [InComponentClass('IND2')] p153: confinementstyle=ConfineIn formatcopy=TRUE lockcomponents=FALSE outline 49755,49945 50405,49945 50405,50075 49755,50075
RoomDefinition IND3 [InComponentClass('IND3')] p154: confinementstyle=ConfineIn formatcopy=TRUE lockcomponents=FALSE outline 49755,49945 50405,49945 50405,50075 49755,50075
RoomDefinition L1 [InComponentClass('L1')] p155: confinementstyle=ConfineIn formatcopy=TRUE lockcomponents=FALSE outline 7045,3830 7340,3830 7340,4430 7045,4430
RoomDefinition L2 [InComponentClass('L2')] p156: confinementstyle=ConfineIn formatcopy=TRUE lockcomponents=FALSE outline 49755,49950 50295,49950 50295,50075 49755,50075
RoomDefinition L3 [InComponentClass('L3')] p157: confinementstyle=ConfineIn formatcopy=TRUE lockcomponents=FALSE outline 49755,49950 50295,49950 50295,50075 49755,50075
RoomDefinition L4 [InComponentClass('L4')] p158: confinementstyle=ConfineIn formatcopy=TRUE lockcomponents=FALSE outline 49755,49950 50295,49950 50295,50075 49755,50075
RoomDefinition L5 [InComponentClass('L5')] p159: confinementstyle=ConfineIn formatcopy=TRUE lockcomponents=FALSE outline 49755,49950 50295,49950 50295,50075 49755,50075
RoomDefinition L6 [InComponentClass('L6')] p160: confinementstyle=ConfineIn formatcopy=TRUE lockcomponents=FALSE outline 49755,49950 50295,49950 50295,50075 49755,50075
RoomDefinition L7 [InComponentClass('L7')] p161: confinementstyle=ConfineIn formatcopy=TRUE lockcomponents=FALSE outline 49755,49950 50295,49950 50295,50075 49755,50075
RoomDefinition L8 [InComponentClass('L8')] p162: confinementstyle=ConfineIn formatcopy=TRUE lockcomponents=FALSE outline 49755,49950 50295,49950 50295,50075 49755,50075
RoomDefinition L9 [InComponentClass('L9')] p163: confinementstyle=ConfineIn formatcopy=TRUE lockcomponents=FALSE outline 49755,49950 50295,49950 50295,50075 49755,50075
RoomDefinition L10 [InComponentClass('L10')] p164: confinementstyle=ConfineIn formatcopy=TRUE lockcomponents=FALSE outline 49755,49950 50345,49950 50345,50075 49755,50075
RoomDefinition L11 [InComponentClass('L11')] p165: confinementstyle=ConfineIn formatcopy=TRUE lockcomponents=FALSE outline 49755,49950 50325,49950 50325,50075 49755,50075
RoomDefinition L12 [InComponentClass('L12')] p166: confinementstyle=ConfineIn formatcopy=TRUE lockcomponents=FALSE outline 49755,49950 50345,49950 50345,50075 49755,50075
RoomDefinition L13 [InComponentClass('L13')] p167: confinementstyle=ConfineIn formatcopy=TRUE lockcomponents=FALSE outline 49755,49950 50345,49950 50345,50075 49755,50075
RoomDefinition L14 [InComponentClass('L14')] p168: confinementstyle=ConfineIn formatcopy=TRUE lockcomponents=FALSE outline 49755,49950 50345,49950 50345,50075 49755,50075
RoomDefinition L15 [InComponentClass('L15')] p169: confinementstyle=ConfineIn formatcopy=TRUE lockcomponents=FALSE outline 49755,49950 50345,49950 50345,50075 49755,50075
RoomDefinition L16 [InComponentClass('L16')] p170: confinementstyle=ConfineIn formatcopy=TRUE lockcomponents=FALSE outline 49755,49950 50345,49950 50345,50075 49755,50075
RoomDefinition L17 [InComponentClass('L17')] p171: confinementstyle=ConfineIn formatcopy=TRUE lockcomponents=FALSE outline 49755,49950 50345,49950 50345,50075 49755,50075
RoomDefinition L18 [InComponentClass('L18')] p172: confinementstyle=ConfineIn formatcopy=TRUE lockcomponents=FALSE outline 49755,49950 50345,49950 50345,50075 49755,50075
RoomDefinition L19 [InComponentClass('L19')] p173: confinementstyle=ConfineIn formatcopy=TRUE lockcomponents=FALSE outline 49755,49950 50345,49950 50345,50075 49755,50075
RoomDefinition L20 [InComponentClass('L20')] p174: confinementstyle=ConfineIn formatcopy=TRUE lockcomponents=FALSE outline 49755,49950 50355,49950 50355,50075 49755,50075
RoomDefinition L21 [InComponentClass('L21')] p175: confinementstyle=ConfineIn formatcopy=TRUE lockcomponents=FALSE outline 49755,49950 50335,49950 50335,50075 49755,50075
RoomDefinition L22 [InComponentClass('L22')] p176: confinementstyle=ConfineIn formatcopy=TRUE lockcomponents=FALSE outline 49755,49950 50355,49950 50355,50075 49755,50075
RoomDefinition L23 [InComponentClass('L23')] p177: confinementstyle=ConfineIn formatcopy=TRUE lockcomponents=FALSE outline 49755,49950 50355,49950 50355,50075 49755,50075
RoomDefinition L24 [InComponentClass('L24')] p178: confinementstyle=ConfineIn formatcopy=TRUE lockcomponents=FALSE outline 49755,49950 50355,49950 50355,50075 49755,50075
RoomDefinition L25 [InComponentClass('L25')] p179: confinementstyle=ConfineIn formatcopy=TRUE lockcomponents=FALSE outline 49755,49950 50355,49950 50355,50075 49755,50075
RoomDefinition L26 [InComponentClass('L26')] p180: confinementstyle=ConfineIn formatcopy=TRUE lockcomponents=FALSE outline 49755,49950 50355,49950 50355,50075 49755,50075
RoomDefinition L27 [InComponentClass('L27')] p181: confinementstyle=ConfineIn formatcopy=TRUE lockcomponents=FALSE outline 49755,49950 50355,49950 50355,50075 49755,50075
RoomDefinition L28 [InComponentClass('L28')] p182: confinementstyle=ConfineIn formatcopy=TRUE lockcomponents=FALSE outline 49755,49950 50355,49950 50355,50075 49755,50075
RoomDefinition SEGCTRL1 [InComponentClass('SEGCTRL1')] p183: confinementstyle=ConfineIn formatcopy=TRUE lockcomponents=FALSE outline 7045,4800 8440,4800 8440,5460 7045,5460
RoomDefinition SEGCTRL2 [InComponentClass('SEGCTRL2')] p184: confinementstyle=ConfineIn formatcopy=TRUE lockcomponents=FALSE outline 49755,49725 50705,49725 50705,50275 49755,50275
RoomDefinition SEGCTRL3 [InComponentClass('SEGCTRL3')] p185: confinementstyle=ConfineIn formatcopy=TRUE lockcomponents=FALSE outline 49755,49725 50705,49725 50705,50275 49755,50275
RoomDefinition SEGCTRL4 [InComponentClass('SEGCTRL4')] p186: confinementstyle=ConfineIn formatcopy=TRUE lockcomponents=FALSE outline 49755,49725 50705,49725 50705,50275 49755,50275
RoomDefinition SUPPLY [InComponentClass('SUPPLY')] p187: confinementstyle=ConfineIn formatcopy=TRUE lockcomponents=FALSE outline 1090,4170 3785,4170 3785,4750 1090,4750
RoomDefinition BUS3 [InComponentClass('BUS3')] p188: confinementstyle=ConfineIn formatcopy=TRUE lockcomponents=FALSE outline 0,0 2000,0 2000,1000 0,1000
RoomDefinition BUS2 [InComponentClass('BUS2')] p189: confinementstyle=ConfineIn formatcopy=TRUE lockcomponents=FALSE outline 0,0 2000,0 2000,1000 0,1000
RoutingVias [All] p1: holewidth=28 width=50 viastyle="Through Hole" minholewidth=28 minwidth=50 maxholewidth=28 maxwidth=50
SolderMaskExpansion [All] p1: expansion=4
TestPointUsage [All] p1: valid=0 allowmultiple=FALSE
Testpoint [All] p1: side=15 testpointundercomponent=TRUE minsize=40 maxsize=100 preferedsize=60 minholesize=0 maxholesize=40 preferedholesize=32 testpointgrid=1 style=1023 order=0123456789
Width [All] p1: maxlimit=10 minlimit=10 preferedwidth=10
18 further rules are at their usual default settings.

## Classes and differential pairs
channel class TPIC6B595_CommunicationInterface: SEGCTRL1 SEGCTRL2 SEGCTRL3 SEGCTRL4
channel class Line: L1 L2 L3 L4 L5 L6 L7 L8 L9 L10 L11 L12 L13 L14 L15 L16 L17 L18 L19 L20 L21 L22 L23 L24 L25 L26 L27 L28
channel class Led7Seg: 7SEG1 7SEG2 7SEG3 7SEG4
channel class Indicator: IND1 IND2 IND3
channel class Dot: DOT1 DOT2 DOT3 DOT4 DOT5 DOT6 DOT7 DOT8 DOT9 DOT10 DOT11 DOT12 DOT13 DOT14 DOT15 DOT16 DOT17 DOT18 DOT19 DOT20 DOT21 DOT22 DOT23 DOT24 DOT25 DOT26 DOT27 DOT28 DOT29 DOT30 DOT31 DOT32 DOT33 DOT34 DOT35 DOT36 DOT37 DOT38 DOT39 DOT40 DOT41 DOT42 DOT43 DOT44 DOT45 DOT46 DOT47 DOT48 DOT49 DOT50 DOT51 DOT52 DOT53 DOT54 DOT55 DOT56 DOT57 DOT58 DOT59 DOT60 DOT61 DOT62 DOT63 DOT64 DOT65 DOT66 DOT67 DOT68 DOT69 DOT70 DOT71 DOT72 DOT73 DOT74 DOT75 DOT76 DOT77 DOT78 DOT79 DOT80 DOT81 DOT82 DOT83 DOT84 DOT85 DOT86 DOT87 DOT88 DOT89 DOT90 DOT91 DOT92 DOT93 DOT94 DOT95 DOT96 DOT97 DOT98 DOT99 DOT100 DOT101 DOT102 DOT103 DOT104 DOT105 DOT106 DOT107 DOT108 DOT109 DOT110 DOT111 DOT112 DOT113 DOT114 DOT115 DOT116 DOT117 DOT118 DOT119 DOT120 DOT121 DOT122 DOT123 DOT124 DOT125 DOT126 DOT127 DOT128 DOT129 DOT130 DOT131 DOT132 DOT133 DOT134 DOT135 DOT136 DOT137 DOT138 DOT139 DOT140 DOT141 DOT142 DOT143 DOT144
channel class BUSConnector: BUS2 BUS3
component class SUPPLY: C11 C12 C13 C14 D4 D5 D6 D7 D8 R6 U4
component class SEGCTRL4: C10_SEGCTRL4 U3_SEGCTRL4
component class SEGCTRL3: C10_SEGCTRL3 U3_SEGCTRL3
component class SEGCTRL2: C10_SEGCTRL2 U3_SEGCTRL2
component class SEGCTRL1: C10_SEGCTRL1 U3_SEGCTRL1
component class L28: R5_L28
component class L27: R5_L27
component class L26: R5_L26
component class L25: R5_L25
component class L24: R5_L24
component class L23: R5_L23
component class L22: R5_L22
component class L21: R5_L21
component class L20: R5_L20
component class L19: R5_L19
component class L18: R5_L18
component class L17: R5_L17
component class L16: R5_L16
component class L15: R5_L15
component class L14: R5_L14
component class L13: R5_L13
component class L12: R5_L12
component class L11: R5_L11
component class L10: R5_L10
component class L9: R5_L9
component class L8: R5_L8
component class L7: R5_L7
component class L6: R5_L6
component class L5: R5_L5
component class L4: R5_L4
component class L3: R5_L3
component class L2: R5_L2
component class L1: R5_L1
component class IND3: D3_IND3 R3_IND3
component class IND2: D3_IND2 R3_IND2
component class IND1: D3_IND1 R3_IND1
component class DOT144: D2_DOT144
component class DOT143: D2_DOT143
component class DOT142: D2_DOT142
component class DOT141: D2_DOT141
component class DOT140: D2_DOT140
component class DOT139: D2_DOT139
component class DOT138: D2_DOT138
component class DOT137: D2_DOT137
component class DOT136: D2_DOT136
component class DOT135: D2_DOT135
component class DOT134: D2_DOT134
component class DOT133: D2_DOT133
component class DOT132: D2_DOT132
component class DOT131: D2_DOT131
component class DOT130: D2_DOT130
component class DOT129: D2_DOT129
component class DOT128: D2_DOT128
component class DOT127: D2_DOT127
component class DOT126: D2_DOT126
component class DOT125: D2_DOT125
component class DOT124: D2_DOT124
component class DOT123: D2_DOT123
component class DOT122: D2_DOT122
component class DOT121: D2_DOT121
component class DOT120: D2_DOT120
component class DOT119: D2_DOT119
component class DOT118: D2_DOT118
component class DOT117: D2_DOT117
component class DOT116: D2_DOT116
component class DOT115: D2_DOT115
component class DOT114: D2_DOT114
component class DOT113: D2_DOT113
component class DOT112: D2_DOT112
component class DOT111: D2_DOT111
component class DOT110: D2_DOT110
component class DOT109: D2_DOT109
component class DOT108: D2_DOT108
component class DOT107: D2_DOT107
component class DOT106: D2_DOT106
component class DOT105: D2_DOT105
component class DOT104: D2_DOT104
component class DOT103: D2_DOT103
component class DOT102: D2_DOT102
component class DOT101: D2_DOT101
component class DOT100: D2_DOT100
component class DOT99: D2_DOT99
component class DOT98: D2_DOT98
component class DOT97: D2_DOT97
component class DOT96: D2_DOT96
component class DOT95: D2_DOT95
component class DOT94: D2_DOT94
component class DOT93: D2_DOT93
component class DOT92: D2_DOT92
component class DOT91: D2_DOT91
component class DOT90: D2_DOT90
component class DOT89: D2_DOT89
component class DOT88: D2_DOT88
component class DOT87: D2_DOT87
component class DOT86: D2_DOT86
component class DOT85: D2_DOT85
component class DOT84: D2_DOT84
component class DOT83: D2_DOT83
component class DOT82: D2_DOT82
component class DOT81: D2_DOT81
component class DOT80: D2_DOT80
component class DOT79: D2_DOT79
component class DOT78: D2_DOT78
component class DOT77: D2_DOT77
component class DOT76: D2_DOT76
component class DOT75: D2_DOT75
component class DOT74: D2_DOT74
component class DOT73: D2_DOT73
component class DOT72: D2_DOT72
component class DOT71: D2_DOT71
component class DOT70: D2_DOT70
component class DOT69: D2_DOT69
component class DOT68: D2_DOT68
component class DOT67: D2_DOT67
component class DOT66: D2_DOT66
component class DOT65: D2_DOT65
component class DOT64: D2_DOT64
component class DOT63: D2_DOT63
component class DOT62: D2_DOT62
component class DOT61: D2_DOT61
component class DOT60: D2_DOT60
component class DOT59: D2_DOT59
component class DOT58: D2_DOT58
component class DOT57: D2_DOT57
component class DOT56: D2_DOT56
component class DOT55: D2_DOT55
component class DOT54: D2_DOT54
component class DOT53: D2_DOT53
component class DOT52: D2_DOT52
component class DOT51: D2_DOT51
component class DOT50: D2_DOT50
component class DOT49: D2_DOT49
component class DOT48: D2_DOT48
component class DOT47: D2_DOT47
component class DOT46: D2_DOT46
component class DOT45: D2_DOT45
component class DOT44: D2_DOT44
component class DOT43: D2_DOT43
component class DOT42: D2_DOT42
component class DOT41: D2_DOT41
component class DOT40: D2_DOT40
component class DOT39: D2_DOT39
component class DOT38: D2_DOT38
component class DOT37: D2_DOT37
component class DOT36: D2_DOT36
component class DOT35: D2_DOT35
component class DOT34: D2_DOT34
component class DOT33: D2_DOT33
component class DOT32: D2_DOT32
component class DOT31: D2_DOT31
component class DOT30: D2_DOT30
component class DOT29: D2_DOT29
component class DOT28: D2_DOT28
component class DOT27: D2_DOT27
component class DOT26: D2_DOT26
component class DOT25: D2_DOT25
component class DOT24: D2_DOT24
component class DOT23: D2_DOT23
component class DOT22: D2_DOT22
component class DOT21: D2_DOT21
component class DOT20: D2_DOT20
component class DOT19: D2_DOT19
component class DOT18: D2_DOT18
component class DOT17: D2_DOT17
component class DOT16: D2_DOT16
component class DOT15: D2_DOT15
component class DOT14: D2_DOT14
component class DOT13: D2_DOT13
component class DOT12: D2_DOT12
component class DOT11: D2_DOT11
component class DOT10: D2_DOT10
component class DOT9: D2_DOT9
component class DOT8: D2_DOT8
component class DOT7: D2_DOT7
component class DOT6: D2_DOT6
component class DOT5: D2_DOT5
component class DOT4: D2_DOT4
component class DOT3: D2_DOT3
component class DOT2: D2_DOT2
component class DOT1: D2_DOT1
component class DISPLAY: C9
component class CPU: C2 C3 C4 C5 C6 C7 C8 P1 R2 S1 U2 Y1
component class COM485: C1 D1 R1 U1
component class BUS3: J1_BUS3
component class BUS2: J1_BUS2
component class 7SEG4: R4_7SEG4
component class 7SEG3: R4_7SEG3
component class 7SEG2: R4_7SEG2
component class 7SEG1: R4_7SEG1

## Components (designator, comment, footprint, x,y, rotation, side; value= is the part's Value field where it differs from the comment)
C1 "Cap Pol3" C0805 6005,1555 r0 top
C2 "Cap Pol3" C0805 8800,2110 r0 top
C3 "Cap Pol3" C0805 8450,2110 r0 top
C4 "Cap Pol3" C0805 8070,2110 r0 top
C5 "Cap Pol3" C0805 7130,2110 r0 top
C6 "Cap Pol3" C0805 7325,2110 r0 top
C7 "Cap Pol3" C0805 7525,2110 r0 top
C8 "Cap Pol3" C0805 7720,2110 r0 top
C9 "Cap Pol3" C0805 7130,2340 r0 top
C10_SEGCTRL1 "Cap Pol3" C0805 7085,5275 r90 top (schematic designator C10)
C10_SEGCTRL2 "Cap Pol3" C0805 49999.5,49999.5 r0 top (schematic designator C10)
C10_SEGCTRL3 "Cap Pol3" C0805 49999.5,49999.5 r0 top (schematic designator C10)
C10_SEGCTRL4 "Cap Pol3" C0805 49999.5,49999.5 r0 top (schematic designator C10)
C11 "EEH-ZA1E101XP" EEH-ZA1E101XP 2505,4460 r90 top
C12 "25SVPF47M" EEH-ZA1E101XP 2840,4460 r90 top
C13 "CAP0.1uF" CAP0603 1305,4580 r90 top
C14 "CAP0.1uF" CAP0603 1460,4520 r90 top
D1 "SM712" SW712 6350,1505 r0 top
D2_DOT1 "LED2" 3.2X1.6X1.1 7100,3635 r90 top (schematic designator D2)
D2_DOT2 "LED2" 3.2X1.6X1.1 49999.5,49999.5 r0 top (schematic designator D2)
D2_DOT3 "LED2" 3.2X1.6X1.1 49999.5,49999.5 r0 top (schematic designator D2)
D2_DOT4 "LED2" 3.2X1.6X1.1 49999.5,49999.5 r0 top (schematic designator D2)
D2_DOT5 "LED2" 3.2X1.6X1.1 49999.5,49999.5 r0 top (schematic designator D2)
D2_DOT6 "LED2" 3.2X1.6X1.1 49999.5,49999.5 r0 top (schematic designator D2)
D2_DOT7 "LED2" 3.2X1.6X1.1 49999.5,49999.5 r0 top (schematic designator D2)
D2_DOT8 "LED2" 3.2X1.6X1.1 49999.5,49999.5 r0 top (schematic designator D2)
D2_DOT9 "LED2" 3.2X1.6X1.1 49999.5,49999.5 r0 top (schematic designator D2)
D2_DOT10 "LED2" 3.2X1.6X1.1 7100,4505 r90 top (schematic designator D2)
D2_DOT11 "LED2" 3.2X1.6X1.1 49999.5,49999.5 r0 top (schematic designator D2)
D2_DOT12 "LED2" 3.2X1.6X1.1 49999.5,49999.5 r0 top (schematic designator D2)
D2_DOT13 "LED2" 3.2X1.6X1.1 49999.5,49999.5 r0 top (schematic designator D2)
D2_DOT14 "LED2" 3.2X1.6X1.1 49999.5,49999.5 r0 top (schematic designator D2)
D2_DOT15 "LED2" 3.2X1.6X1.1 49999.5,49999.5 r0 top (schematic designator D2)
D2_DOT16 "LED2" 3.2X1.6X1.1 49999.5,49999.5 r0 top (schematic designator D2)
D2_DOT17 "LED2" 3.2X1.6X1.1 49999.5,49999.5 r0 top (schematic designator D2)
D2_DOT18 "LED2" 3.2X1.6X1.1 49999.5,49999.5 r0 top (schematic designator D2)
D2_DOT19 "LED2" 3.2X1.6X1.1 49999.5,49999.5 r0 top (schematic designator D2)
D2_DOT20 "LED2" 3.2X1.6X1.1 49999.5,49999.5 r0 top (schematic designator D2)
D2_DOT21 "LED2" 3.2X1.6X1.1 49999.5,49999.5 r0 top (schematic designator D2)
D2_DOT22 "LED2" 3.2X1.6X1.1 49999.5,49999.5 r0 top (schematic designator D2)
D2_DOT23 "LED2" 3.2X1.6X1.1 49999.5,49999.5 r0 top (schematic designator D2)
D2_DOT24 "LED2" 3.2X1.6X1.1 49999.5,49999.5 r0 top (schematic designator D2)
D2_DOT25 "LED2" 3.2X1.6X1.1 49999.5,49999.5 r0 top (schematic designator D2)
D2_DOT26 "LED2" 3.2X1.6X1.1 49999.5,49999.5 r0 top (schematic designator D2)
D2_DOT27 "LED2" 3.2X1.6X1.1 49999.5,49999.5 r0 top (schematic designator D2)
D2_DOT28 "LED2" 3.2X1.6X1.1 49999.5,49999.5 r0 top (schematic designator D2)
D2_DOT29 "LED2" 3.2X1.6X1.1 49999.5,49999.5 r0 top (schematic designator D2)
D2_DOT30 "LED2" 3.2X1.6X1.1 49999.5,49999.5 r0 top (schematic designator D2)
D2_DOT31 "LED2" 3.2X1.6X1.1 49999.5,49999.5 r0 top (schematic designator D2)
D2_DOT32 "LED2" 3.2X1.6X1.1 49999.5,49999.5 r0 top (schematic designator D2)
D2_DOT33 "LED2" 3.2X1.6X1.1 49999.5,49999.5 r0 top (schematic designator D2)
D2_DOT34 "LED2" 3.2X1.6X1.1 49999.5,49999.5 r0 top (schematic designator D2)
D2_DOT35 "LED2" 3.2X1.6X1.1 49999.5,49999.5 r0 top (schematic designator D2)
D2_DOT36 "LED2" 3.2X1.6X1.1 49999.5,49999.5 r0 top (schematic designator D2)
D2_DOT37 "LED2" 3.2X1.6X1.1 49999.5,49999.5 r0 top (schematic designator D2)
D2_DOT38 "LED2" 3.2X1.6X1.1 49999.5,49999.5 r0 top (schematic designator D2)
D2_DOT39 "LED2" 3.2X1.6X1.1 49999.5,49999.5 r0 top (schematic designator D2)
D2_DOT40 "LED2" 3.2X1.6X1.1 49999.5,49999.5 r0 top (schematic designator D2)
D2_DOT41 "LED2" 3.2X1.6X1.1 49999.5,49999.5 r0 top (schematic designator D2)
D2_DOT42 "LED2" 3.2X1.6X1.1 49999.5,49999.5 r0 top (schematic designator D2)
D2_DOT43 "LED2" 3.2X1.6X1.1 49999.5,49999.5 r0 top (schematic designator D2)
D2_DOT44 "LED2" 3.2X1.6X1.1 49999.5,49999.5 r0 top (schematic designator D2)
D2_DOT45 "LED2" 3.2X1.6X1.1 49999.5,49999.5 r0 top (schematic designator D2)
D2_DOT46 "LED2" 3.2X1.6X1.1 49999.5,49999.5 r0 top (schematic designator D2)
D2_DOT47 "LED2" 3.2X1.6X1.1 49999.5,49999.5 r0 top (schematic designator D2)
D2_DOT48 "LED2" 3.2X1.6X1.1 49999.5,49999.5 r0 top (schematic designator D2)
D2_DOT49 "LED2" 3.2X1.6X1.1 49999.5,49999.5 r0 top (schematic designator D2)
D2_DOT50 "LED2" 3.2X1.6X1.1 49999.5,49999.5 r0 top (schematic designator D2)
D2_DOT51 "LED2" 3.2X1.6X1.1 49999.5,49999.5 r0 top (schematic designator D2)
D2_DOT52 "LED2" 3.2X1.6X1.1 49999.5,49999.5 r0 top (schematic designator D2)
D2_DOT53 "LED2" 3.2X1.6X1.1 49999.5,49999.5 r0 top (schematic designator D2)
D2_DOT54 "LED2" 3.2X1.6X1.1 49999.5,49999.5 r0 top (schematic designator D2)
D2_DOT55 "LED2" 3.2X1.6X1.1 49999.5,49999.5 r0 top (schematic designator D2)
D2_DOT56 "LED2" 3.2X1.6X1.1 49999.5,49999.5 r0 top (schematic designator D2)
D2_DOT57 "LED2" 3.2X1.6X1.1 49999.5,49999.5 r0 top (schematic designator D2)
D2_DOT58 "LED2" 3.2X1.6X1.1 49999.5,49999.5 r0 top (schematic designator D2)
D2_DOT59 "LED2" 3.2X1.6X1.1 49999.5,49999.5 r0 top (schematic designator D2)
D2_DOT60 "LED2" 3.2X1.6X1.1 49999.5,49999.5 r0 top (schematic designator D2)
D2_DOT61 "LED2" 3.2X1.6X1.1 49999.5,49999.5 r0 top (schematic designator D2)
D2_DOT62 "LED2" 3.2X1.6X1.1 49999.5,49999.5 r0 top (schematic designator D2)
D2_DOT63 "LED2" 3.2X1.6X1.1 49999.5,49999.5 r0 top (schematic designator D2)
D2_DOT64 "LED2" 3.2X1.6X1.1 49999.5,49999.5 r0 top (schematic designator D2)
D2_DOT65 "LED2" 3.2X1.6X1.1 49999.5,49999.5 r0 top (schematic designator D2)
D2_DOT66 "LED2" 3.2X1.6X1.1 49999.5,49999.5 r0 top (schematic designator D2)
D2_DOT67 "LED2" 3.2X1.6X1.1 49999.5,49999.5 r0 top (schematic designator D2)
D2_DOT68 "LED2" 3.2X1.6X1.1 49999.5,49999.5 r0 top (schematic designator D2)
D2_DOT69 "LED2" 3.2X1.6X1.1 49999.5,49999.5 r0 top (schematic designator D2)
D2_DOT70 "LED2" 3.2X1.6X1.1 49999.5,49999.5 r0 top (schematic designator D2)
D2_DOT71 "LED2" 3.2X1.6X1.1 49999.5,49999.5 r0 top (schematic designator D2)
D2_DOT72 "LED2" 3.2X1.6X1.1 49999.5,49999.5 r0 top (schematic designator D2)
D2_DOT73 "LED2" 3.2X1.6X1.1 49999.5,49999.5 r0 top (schematic designator D2)
D2_DOT74 "LED2" 3.2X1.6X1.1 49999.5,49999.5 r0 top (schematic designator D2)
D2_DOT75 "LED2" 3.2X1.6X1.1 49999.5,49999.5 r0 top (schematic designator D2)
D2_DOT76 "LED2" 3.2X1.6X1.1 49999.5,49999.5 r0 top (schematic designator D2)
D2_DOT77 "LED2" 3.2X1.6X1.1 49999.5,49999.5 r0 top (schematic designator D2)
D2_DOT78 "LED2" 3.2X1.6X1.1 49999.5,49999.5 r0 top (schematic designator D2)
D2_DOT79 "LED2" 3.2X1.6X1.1 49999.5,49999.5 r0 top (schematic designator D2)
D2_DOT80 "LED2" 3.2X1.6X1.1 49999.5,49999.5 r0 top (schematic designator D2)
D2_DOT81 "LED2" 3.2X1.6X1.1 49999.5,49999.5 r0 top (schematic designator D2)
D2_DOT82 "LED2" 3.2X1.6X1.1 49999.5,49999.5 r0 top (schematic designator D2)
D2_DOT83 "LED2" 3.2X1.6X1.1 49999.5,49999.5 r0 top (schematic designator D2)
D2_DOT84 "LED2" 3.2X1.6X1.1 49999.5,49999.5 r0 top (schematic designator D2)
D2_DOT85 "LED2" 3.2X1.6X1.1 49999.5,49999.5 r0 top (schematic designator D2)
D2_DOT86 "LED2" 3.2X1.6X1.1 49999.5,49999.5 r0 top (schematic designator D2)
D2_DOT87 "LED2" 3.2X1.6X1.1 49999.5,49999.5 r0 top (schematic designator D2)
D2_DOT88 "LED2" 3.2X1.6X1.1 49999.5,49999.5 r0 top (schematic designator D2)